# Altium PCB DT2.PcbDoc
Units mil, origin at the board's own origin, x right, y up, seen from the top; angles counter-clockwise.
Board outline 6000 x 4000 mil, 2 copper layers (Top Layer, Bottom Layer); 93 components, 47 nets, 265 pads, 0 vias.
Unrouted connection lines stored in the file: 186.
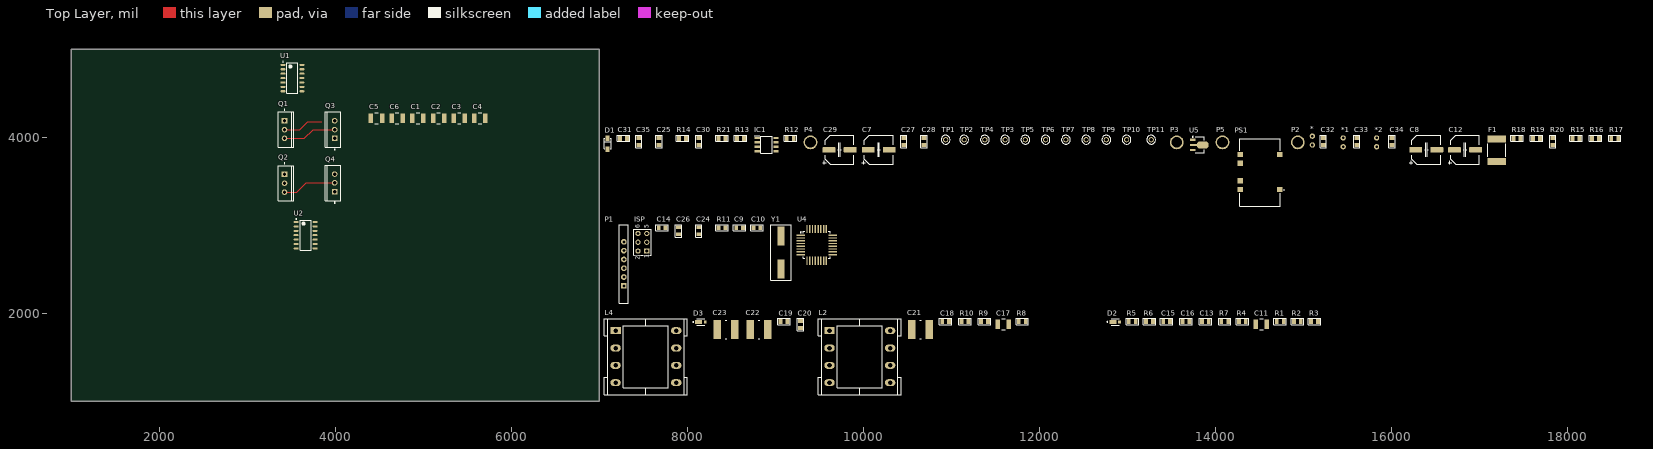
[diagram p0: Top Layer view]
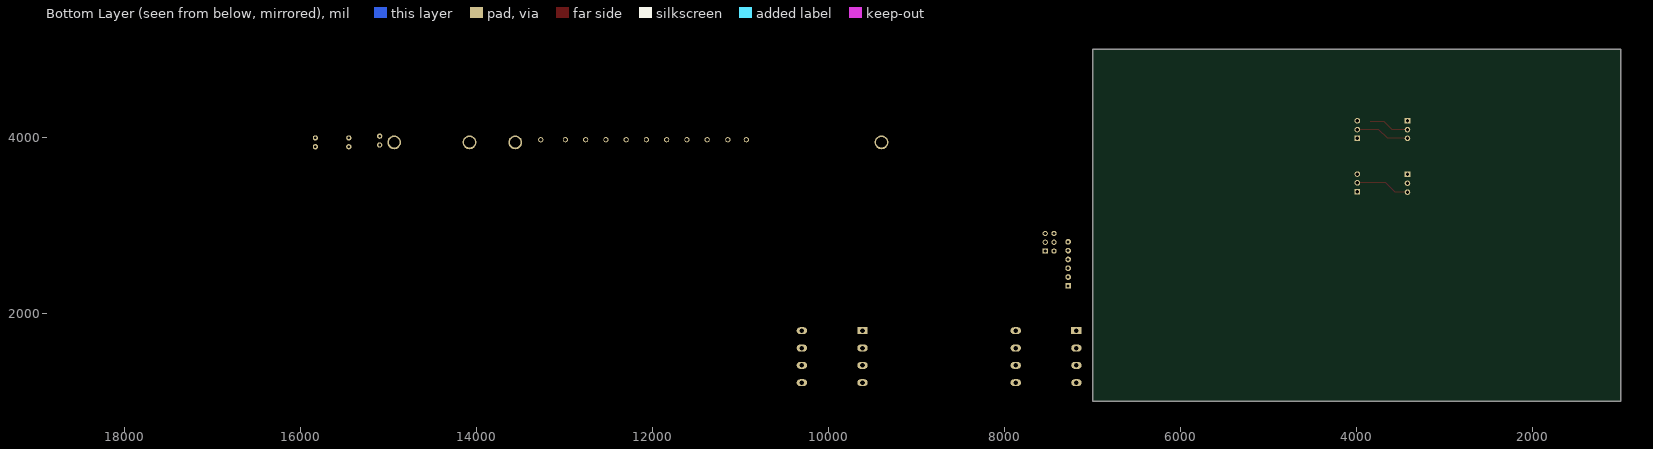
[diagram p1: Bottom Layer view, seen from below]

## Layer stack, top to bottom
Top Solder: solder mask 0.4, Solder Resist, Dk 3.5
Top Layer: signal copper 1.4
Dielectric 1: dielectric 12.6, FR-4, Dk 4.8
Bottom Layer: signal copper 1.4
Bottom Solder: solder mask 0.4, Solder Resist, Dk 3.5

## Board outline
1000,1000 7000,1000 7000,5000 1000,5000

## Design rules (kind name [scope] priority, off if disabled: settings)
Clearance [All] p1: gap=10 ignorepadtopadclearanceinfootprint=FALSE except(0: Arc-Hole Track-Hole SMDPad-Hole THPad-Hole Via-Hole Fill-Hole Poly-Hole Region-Hole Text-Hole)
PolygonConnect [All] p1: connectstyle=Relief reliefconductorwidth=10 reliefentries=4 polygonreliefangle="90 Angle" airgapwidth=10
RoutingVias [All] p1: holewidth=28 width=50 viastyle="Through Hole" minholewidth=28 minwidth=50 maxholewidth=28 maxwidth=50
SolderMaskExpansion [All] p1: expansion=4 istentingtop=FALSE
Width [All] p1: maxlimit=10 minlimit=10 preferedwidth=10
30 further rules are at their usual default settings.

## Classes and differential pairs
component class Misc: * *1 *2 C7 C8 C12 C25 C27 C28 C29 C30 C31 C32 C33 C34 C35 D1 F1 IC1 P2 P3 P4 P5 PS1 R12 R13 R14 R15 R16 R17 R18 R19 R20 R21 TP1 TP2 TP3 TP4 TP5 TP6 TP7 TP8 TP9 TP10 TP11 U5
component class Control: C9 C10 C14 C24 C26 ISP P1 R11 U4 Y1
component class Bridge: C1 C2 C3 C4 C5 C6 C11 C13 C15 C16 C17 C18 C19 C20 C21 C22 C23 D2 D3 L2 L4 Q1 Q2 Q3 Q4 R1 R2 R3 R4 R5 R6 R7 R8 R9 R10 U1 U2

## Components (designator, comment, footprint, x,y, rotation, side; value= is the part's Value field where it differs from the comment)
* "Thermistor" LeadedThermistor 15100,3910 r0 top
*1 "Thermistor" LeadedThermistor 15450,3890 r0 top
*2 "Thermistor" LeadedThermistor 15830,3890 r0 top
C1 "*" C1210 4940,4215 r0 top
C2 "*" C1210 5175,4215 r0 top
C3 "*" C1210 5410,4215 r0 top
C4 "*" C1210 5645,4215 r0 top
C5 "*" C1210 4470,4215 r0 top
C6 "*" C1210 4705,4215 r0 top
C7 "*" "CAP POL 8x5.4mm SMT" 10175,3855 r0 top
C8 "10u" "CAP POL 8x5.4mm SMT" 16395,3855 r0 top
C9 "*" "0805 CAP" 8595,2970 r0 top
C10 "*" "0805 CAP" 8790,2970 r0 top
C11 "10u" C1210 14520,1875 r0 top
C12 "10u" "CAP POL 8x5.4mm SMT" 16835,3855 r0 top
C13 "*" "0805 CAP" 13885,1905 r0 top
C14 "*" "0805 CAP" 7715,2970 r0 top
C15 "*" "0805 CAP" 13445,1905 r0 top
C16 "*" "0805 CAP" 13665,1905 r0 top
C17 "10u" C1210 11590,1875 r0 top
C18 "*" "0805 CAP" 10935,1905 r0 top
C19 "*" "0805 CAP" 9100,1905 r0 top
C20 "*" "0805 CAP" 9285,1870 r90 top
C21 "*" C5750 10650,1815 r0 top
C22 "*" C5750 8815,1815 r0 top
C23 "*" C5750 8440,1815 r0 top
C24 "*" "0805 CAP" 8130,2935 r90 top
C25 "*" "0805 CAP" 7680,3950 r90 top
C26 "*" "0805 CAP" 7900,2935 r90 top
C27 "*" "0805 CAP" 10460,3950 r90 top
C28 "*" "0805 CAP" 10690,3950 r90 top
C29 "*" "CAP POL 8x5.4mm SMT" 9730,3855 r0 top
C30 "*" "0805 CAP" 8130,3950 r90 top
C31 "*" "0805 CAP" 7275,3985 r0 top
C32 "*" "0805 CAP" 15225,3950 r90 top
C33 "*" "0805 CAP" 15605,3950 r90 top
C34 "*" "0805 CAP" 16005,3950 r90 top
C35 "*" "0805 CAP" 7450,3950 r90 top
D1 "BZT52H-B5V1" SOD123 7095,3925 r90 top
D2 "MSS1P6-M3/89A" FP-96591-MFG 12860,1900 r0 top value=40pF
D3 "MSS1P6-M3/89A" FP-96591-MFG 8155,1900 r0 top value=40pF
F1 "2920L150DR" LFUS-2920L150DR_V 17195,3850 r90 top
IC1 "ACS730KLCTR-20AB-T" SOIC127P600X175-8N 8900,3915 r0 top
ISP "P2" HDR2X3 7540,2705 r90 top
L2 "*" EFD20 9960,1505 r0 top
L4 "*" EFD20 7530,1505 r0 top
P1 "BLE Module Header" HM10_HDR1X6 7280,2310 r90 top
P2 "Lug" "M3 Lug" 14935,3940 r0 top
P3 "Lug" "M3 Lug" 13560,3940 r0 top
P4 "Lug" "M3 Lug" 9400,3940 r0 top
P5 "Lug" "M3 Lug" 14080,3940 r0 top
PS1 "STH0548S12" STH0548S12 14505,3595 r90 top
Q1 "IPP80N04S4-04" INF-PG-TO220-3-1 3425,4085 r0 top
Q2 "IPP80N04S4-04" INF-PG-TO220-3-1 3425,3475 r0 top
Q3 "IPP80N04S4-04" INF-PG-TO220-3-1 3995,4085 r180 top
Q4 "IPP80N04S4-04" INF-PG-TO220-3-1 3995,3480 r180 top
R1 "*" "0805 RES" 14735,1905 r0 top
R2 "*" "0805 RES" 14930,1905 r0 top
R3 "*" "0805 RES" 15125,1905 r0 top
R4 "*" "0805 RES" 14305,1905 r0 top
R5 "*" "0805 RES" 13055,1905 r0 top
R6 "*" "0805 RES" 13250,1905 r0 top
R7 "*" "0805 RES" 14105,1905 r0 top
R8 "*" "0805 RES" 11805,1905 r0 top
R9 "*" "0805 RES" 11375,1905 r0 top
R10 "*" "0805 RES" 11155,1905 r0 top
R11 "*" "0805 RES" 8395,2970 r0 top
R12 "*" "0805 RES" 9170,3985 r0 top
R13 "*" "0805 RES" 8605,3985 r0 top
R14 "*" "0805 RES" 7945,3985 r0 top
R15 "*" "0805 RES" 18095,3985 r0 top
R16 "*" "0805 RES" 18315,3985 r0 top
R17 "*" "0805 RES" 18535,3985 r0 top
R18 "*" "0805 RES" 17425,3985 r0 top
R19 "*" "0805 RES" 17645,3985 r0 top
R20 "*" "0805 RES" 17830,3950 r90 top
R21 "*" "0805 RES" 8395,3985 r0 top
TP1 "5003" TP_TH 10935,3970 r0 top
TP2 "5003" TP_TH 11145,3970 r0 top
TP3 "5003" TP_TH 11610,3970 r0 top
TP4 "5003" TP_TH 11380,3970 r0 top
TP5 "5003" TP_TH 11840,3970 r0 top
TP6 "5003" TP_TH 12070,3970 r0 top
TP7 "5003" TP_TH 12300,3970 r0 top
TP8 "5003" TP_TH 12530,3970 r0 top
TP9 "5003" TP_TH 12760,3970 r0 top
TP10 "5003" TP_TH 12990,3970 r90 top
TP11 "5003" TP_TH 13270,3970 r90 top
U1 "IR21834STRPBF" SOIC127P600X175-14N 3515,4670 r0 top
U2 "IR21834STRPBF" SOIC127P600X175-14N 3665,2885 r0 top
U4 "ATmega328PB MCU" "32 - TQFP" 9470,2775 r0 top
U5 "L78L05" SOT-89 13820,3910 r0 top
Y1 "SMT-XTAL 16MHz" HC49-US 9065,2690 r90 top

## Footprints (in the part's own frame and the unit in brackets; to place one, negate y for a bottom-side part, rotate by r counter-clockwise, add the part's x,y. Pads: shape width x height; smd on the part's side, far side on the other; paste and mask are expansions set on the pad)
"32 - TQFP" [mm]
  rect 2.4x0.4 smd: 1(-4.6,2.8) 2(-4.6,2) 3(-4.6,1.2) 4(-4.6,0.4) 5(-4.6,-0.4) 6(-4.6,-1.2) 7(-4.6,-2) 8(-4.6,-2.8) 17(4.6,-2.8) 18(4.6,-2) 19(4.6,-1.2) 20(4.6,-0.4) 21(4.6,0.4) 22(4.6,1.2) 23(4.6,2) 24(4.6,2.8)
  rect 0.4x2.4 smd: 9(-2.8,-4.6) 10(-2,-4.6) 11(-1.2,-4.6) 12(-0.4,-4.6) 13(0.4,-4.6) 14(1.2,-4.6) 15(2,-4.6) 16(2.8,-4.6) 25(2.8,4.6) 26(2,4.6) 27(1.2,4.6) 28(0.4,4.6) 29(-0.4,4.6) 30(-1.2,4.6) 31(-2,4.6) 32(-2.8,4.6)
  silkscreen extent -4.74,-3.9 3.9,3.9, body extent -4.5,-4.5 4.5,4.5, height 1.3
"0805 CAP" [mm] "http://www.digikey.co.nz/Web%20Export/Supplier%20Content/Vishay_8026/PDF/VishayBeyschlag_SolderPad.pdf?redirected=1 with dimension G modified by +0.25mm"
  rect 1.1x1.4 smd: 1(-1,0) 2(1,0)
  silkscreen extent -1.8,-0.9 1.8,0.9, body extent -1.04,-0.66 1.04,0.66, height 0.61
"0805 RES" [mm] "http://www.digikey.co.nz/Web%20Export/Supplier%20Content/Vishay_8026/PDF/VishayBeyschlag_SolderPad.pdf?redirected=1 with dimension G modified by +0.25mm"
  rect 1.1x1.4 smd: 1(-1,0) 2(1,0)
  silkscreen extent -1.8,-0.9 1.8,0.9, body extent -1.04,-0.66 1.04,0.66, height 0.61
C1210 [mm]
  rect 1.3x2.7 smd: 1(-1.6,0) 2(1.6,0)
  silkscreen extent -0.5,-1.6 0.5,1.6, body extent -1.8,-1.4 1.8,1.4, height 1.24
C5750 [mm] "C5750 footprint"
  rect 2.2x5.5 smd: 1(-2.525,0) 2(2.525,0)
  silkscreen extent -0.25,-2.65 0.25,2.65, body extent -3.05,-2.7 3.05,2.7, height 3.2
"CAP POL 8x5.4mm SMT" [mm]
  round 0.508 on Mech15: 0(0,0)
  rrect25% 3.7x1.6 smd: 1(-3.05,0) 2(3.05,0)
  silkscreen extent -4.9,-4.2 4.15,4.15, body extent -4.5,-4.15 4.5,4.15, height 5.4
EFD20 [mm]
  oval 3x2 hole 1.3: 1(-8.75,-7.5) 1(-8.75,-2.5) 1(-8.75,2.5) 2(8.75,-7.5) 2(8.75,-2.5) 2(8.75,2.5) 2(8.75,7.5)
  rect 3x2 hole 1.3: 1(-8.75,7.5)
  silkscreen extent -12,-11 12,11
FP-96591-MFG [mm]
  rect 2x1.1 smd paste+0 mask+0: 1(-0.65,0)
  rect 0.8x0.8 smd paste+0 mask+0: 2(1.25,0)
  silkscreen extent -2.35,-0.92 1.15,0.92, body extent -1.75,-0.8 1.75,0.8, height 0.25
HC49-US [mm] "20Mhz Crystal"
  rect 5.5x2 smd: 1(-4.75,0) 2(4.75,0)
  silkscreen extent -8,-3 8,3, body extent -4.77,-2.4 4.79,2.4, height 3.8
HDR2X3 [mm] "Connector; Header; 3x2 Position"
  rect 1.5x1.5 hole 0.9: 1(0,0)
  round 1.5 hole 0.9: 2(0,2.54) 3(2.54,0) 4(2.54,2.54) 5(5.08,0) 6(5.08,2.54)
  silkscreen extent -1.27,-1.27 6.35,3.81
HM10_HDR1X6 [mil] "Connector; Header; 6 Position"
  rect 65x65 hole 35.43: 1(0,0)
  round 65 hole 35.43: 2(100,0) 3(200,0) 4(300,0) 5(400,0) 6(500,0)
  silkscreen extent -200,-50 695,50, body extent -142,-39 571,228, height 1843
INF-PG-TO220-3-1 [mm] "FM, 3-Leads, Body 10x4.4mm, Pitch 2.54mm"
  rect 1.6x1.6 hole 1: 1(0,2.54)
  round 1.6 hole 1: 2(0,0) 3(0,-2.54)
  silkscreen extent -1.75,-5.1 2.65,5.87, body extent -1.75,-5.1 2.65,5.1, height 20.7
LeadedThermistor [mil]
  round 60 hole 30: 1(0,0) 2(0,100)
LFUS-2920L150DR_V [mm] "SMD, 2-Leads, Body 5.12x7.355mm"
  rect 2x5.3 smd: 1(-3.3,0) 2(3.3,0)
  silkscreen extent -1.9,-2.56 1.9,2.56, body extent -3.68,-2.56 3.68,2.56, height 1.25
"M3 Lug" [mm]
  round 4 hole 3.1: 1(0,0)
SOD123 [mm] "SOD-123; 2 Leads; Body 2.7 x 1.6 mm, (LxW)"
  rect 1.6x1.2 smd: 1(-1.65,0) 2(1.55,0)
  silkscreen extent -1.5,-1 1.5,1, body extent -1.8,-0.86 1.8,0.86, height 1.21
SOIC127P600X175-8N [mm]
  rect 1.525x0.65 smd: 1(-2.712,1.905) 2(-2.712,0.635) 3(-2.712,-0.635) 4(-2.712,-1.905) 5(2.712,-1.905) 6(2.712,-0.635) 7(2.712,0.635) 8(2.712,1.905)
  silkscreen extent -3.47,-2.45 1.6,2.58, body extent -3,-2.45 3,2.45, height 1.75
SOIC127P600X175-14N [mm] "SOIC, 14-Leads, Body 8.65x3.90mm, Pitch 1.27mm, IPC Medium Density"
  oval 1.45x0.6 smd: 1(-2.725,3.81) 2(-2.725,2.54) 3(-2.725,1.27) 4(-2.725,0) 5(-2.725,-1.27) 6(-2.725,-2.54) 7(-2.725,-3.81) 8(2.725,-3.81) 9(2.725,-2.54) 10(2.725,-1.27) 11(2.725,0) 12(2.725,1.27) 13(2.725,2.54) 14(2.725,3.81)
  silkscreen extent -2.85,-4.35 1.6,4.78, body extent -2,-4.35 2,4.35, height 1.75
SOT-89 [mm] "SOT89, 3-Leads, Body 4.5x2.4 mm, Pitch 1.5mm, Lead Span 4.1mm, IPC Low Density"
  rect 1.6x0.6 smd: 1(-2,1.5) 3(-2,-1.5)
  rect 2x0.7 smd: 2(-1.8,0)
  oct 3.4x2 smd: 2(0.9,0)
  silkscreen extent -2.07,-2.3 1.3,2.47, body extent -2.25,-2.29 2,2.29, height 1.6
STH0548S12 [mm]
  rect 1.5x1.61 smd: 1(-4.88,-5.655) 5(5.28,-5.655) 6(5.28,5.655) 7(2.74,5.655) 9(-2.34,5.655) 10(-4.88,5.655)
  silkscreen extent -9.75,-7 9.75,5.9, body extent -9.75,-6.31 9.75,6.31, height 5.6
TP_TH [mm] "Test Point, Through Hole, Dia 2.54mm"
  round 1.5 hole 1: 1(0,0)
  silkscreen extent -1.27,-1.27 1.27,1.27, body extent -1.27,-1.27 1.27,1.27, height 4.57

## Part data
C1 C2 C3 C4 C5 C6 C9 C10 C11 C13 C14 C15 C16 C17 C18 C19 C20 C21 C22 C23 C24 C25 C26 C27 C28 C30 C31 C32 C33 C34 C35: library part CerCap_SMT, "SMT ceramic capacitor selectable size"
C7 C8 C12 C29: library part ElecCap_SMT_8D0, "CAP ALUM 22UF 20% 50V SMD (Model: UWX1H220MCL1GB)", Capacitance 1="22 µF", ESR (Equivalent Series Resistance)=-, Lifetime @ Temp.="2000 Hrs @ 85°C", Manufacturer=Nichicon, Manufacturer Part Number=UWX1V220MCL1GB, Operating Temperature="-40°C ~ 85°C", Package / Case="Radial, Can - SMD", Supplier Part Number 1=493-2136-1-ND, Tolerance=±20%, Applications="General Purpose", Category=Capacitors, ComponentLink1Description=http://nichicon-us.com/english/products/pdfs/e-uwx.pdf, ComponentLink1URL=http://nichicon-us.com/english/products/pdfs/e-uwx.pdf, Height - Seated (Max)="0.213\" (5.40mm)", Lead Spacing=-, Mounting Type="Surface Mount", Packaging="Cut Tape (CT)", Part Status=Active, Polarization=Polar, Pricing 1="1=0.59, 10=0.406, 100=0.2304, 500=0.16268 (NZD)", Ratings=-, Revision="July-2002: Re-released for DXP Platform.", RoHS="RoHS Compliant", Size / Dimension="0.248\" Dia (6.30mm)", Stock 1=680, Supplier 1=Digi-Key, Surface Mount Land Size="0.260\" L x 0.260\" W (6.60mm x 6.60mm)"
D1: library part Zener_SMT_SOD123, "SMT zener diode with SOD123 package", Manufacturer="Nexperia USA Inc.", Manufacturer Part Number=BZT52H-B5V1,115, Operating Temperature="-65°C ~ 150°C (TA)", Package / Case=SOD-123F, Tolerance=±2%, Category="Discrete Semiconductor Products", ComponentLink1Description=https://assets.nexperia.com/documents/data-sheet/BZT52H_SER.pdf, ComponentLink1URL=https://assets.nexperia.com/documents/data-sheet/BZT52H_SER.pdf, Mounting Type="Surface Mount", Packaging="Cut Tape (CT)", Part Status=Active, Pricing 1="1=0.51, 10=0.408, 100=0.2164, 500=0.14232, 1000=0.09678 (NZD)", RoHS="RoHS Compliant", Stock 1=0, Supplier 1=Digi-Key, Supplier Device Package=SOD-123F
D2 D3: "DIODE SCHOTTKY 60V 1A MICROSMP", Capacitance=40pF, Forward Current=1A, Manufacturer=Vishay, Max Junction Temp=+150°C, Max Repetitive Reverse Voltage=60V, Max Surge Forward Current=25A, Package=96591, Peak Reverse Current=20uA, Temperature="-55°C to +150°C", Temperature Range Low=-55°C, Automotive=No, Category=Diode, ComponentLink2Description=Datasheet, ComponentLink2URL=http://www.vishay.com/docs/89018/mss1p6.pdf, Device Class L1="Discrete Semiconductors", Device Class L2=Diodes, Device Class L3="Schottky Diodes", Digikey Description="DIODE SCHOTTKY 60V 1A MICROSMP", Footprint Url=http://www.vishay.com/docs/96591/microsmp_do-219ad_fredpt.pdf, Height=0.73mm, Lead Free=Yes, Manufacturer Part Number=MSS1P6-M3/89A, Mouser Description="Schottky Diodes & Rectifiers 1.0 Amp 60 Volt", Octopart=https://octopart.com/mss1p6-m3%2F89a-vishay-42763284, RoHS=TRUE, Temperature Range High=+150°C
F1: "PTC Resettable Fuse 1.5A(hold) 3A(trip) 33VDC 40A 1.5W 2s 0.08Ohm SMD Solder Pad 2920 T/R", Case Code (Imperial)=2920, Case Code (Metric)=7351, Current Rating=40A, Hold Current=1.5A, Manufacturer=Littelfuse, Max Operating Temperature=85°C, Min Operating Temperature=-40°C, Operating Supply Voltage=33V, Package Quantity=1500, Power Dissipation=1.5W, Resistance=230mR, Trip Current=3A, Approvals=cULus,TUV, Case/Package=2920, Category="PTC Resettable Fuses", ComponentLink1Description=https://datasheet.ciiva.com/30470/0900766b8128f916-30470046.pdf?src-supplier=RSComponents, ComponentLink1URL=https://datasheet.ciiva.com/30470/0900766b8128f916-30470046.pdf?src-supplier=RSComponents, ComponentLink2Description=https://datasheet.ciiva.com/14119/2920l-eng-datasheet-14119786.pdf?src-supplier=Distrelec, ComponentLink2URL=https://datasheet.ciiva.com/14119/2920l-eng-datasheet-14119786.pdf?src-supplier=Distrelec, ComponentLink3Description=https://datasheet.ciiva.com/325/littelfuse-ptc-2920l-325940.pdf?src-supplier=Digi-Key, ComponentLink3URL=https://datasheet.ciiva.com/325/littelfuse-ptc-2920l-325940.pdf?src-supplier=Digi-Key, ComponentLink4Description=https://datasheet.ciiva.com/325/littelfuse-ptc-2920l-325941.pdf?src-supplier=Digi-Key, ComponentLink4URL=https://datasheet.ciiva.com/325/littelfuse-ptc-2920l-325941.pdf?src-supplier=Digi-Key, ComponentLink5Description=https://datasheet.ciiva.com/325/littelfuse-ptc-2920l-325942.pdf?src-supplier=Digi-Key, ComponentLink5URL=https://datasheet.ciiva.com/325/littelfuse-ptc-2920l-325942.pdf?src-supplier=Digi-Key, ComponentLink6Description=https://datasheet.ciiva.com/1273/578244-1273819.pdf?src-supplier=Element14, ComponentLink6URL=https://datasheet.ciiva.com/1273/578244-1273819.pdf?src-supplier=Element14, ComponentLink7Description=https://datasheet.ciiva.com/16305/littelfuse-ptc-2920l-16305114.pdf?src-supplier=Future+Electronics, ComponentLink7URL=https://datasheet.ciiva.com/16305/littelfuse-ptc-2920l-16305114.pdf?src-supplier=Future+Electronics, ComponentLink8Description=https://datasheet.ciiva.com/15226/getdatasheetpartid-158319-15226903.pdf?src-supplier=Verical, ComponentLink8URL=https://datasheet.ciiva.com/15226/getdatasheetpartid-158319-15226903.pdf?src-supplier=Verical, ComponentLink9Description=https://datasheet.ciiva.com/28410/699682-28410950.pdf?src-supplier=Element14, ComponentLink9URL=https://datasheet.ciiva.com/28410/699682-28410950.pdf?src-supplier=Element14, Height=1.25mm, Lead Free="Lead Free", Length=7.98mm, Manufacturer Part Number=2920L150DR, Max Current Rating=40A, Packaging="Tape and Reel", Pricing 1="1=0.66000, 5=0.64400, 10=0.62400, 50=0.52520, 100=0.43600, 250=0.39640, 500=0.33694 (USD)", REACH SVHC="No SVHC", RoHS=Yes, RoHS Compliant=Yes, Series=2920L, Stock 1=8939, Supplier 1=Digi-Key, Terminal Material=Copper, Termination=SMD/SMT, Time to Trip=2s, Voltage Rating=33V, Voltage Rating (DC)=33V, Width=5.44mm, Working Voltage=33V
IC1: "Integrated Circuit", Manufacturer_Name="Allegro Microsystems", Arrow Part Number=ACS730KLCTR-20AB-T, Arrow Price/Stock=https://www.arrow.com/en/products/acs730klctr-20ab-t/allegro-microsystems?region=nac, Datasheet Link=https://www.allegromicro.com/-/media/files/datasheets/acs730-datasheet.ashx, Height=1.75mm, Manufacturer_Part_Number=ACS730KLCTR-20AB-T
ISP: library part "Header 3X2", "Header, 3-Pin, Dual row", LatestRevisionDate=17-Jul-2002, LatestRevisionNote="Re-released for DXP Platform.", Publisher="Altium Limited"
L2 L4: library part L
P1: library part BLEModule_TH, "2.54mm pitch 6-pin header for BLE module", LatestRevisionDate=17-Jul-2002, LatestRevisionNote="Re-released for DXP Platform.", Publisher="Altium Limited"
PS1: "Power Supply", Manufacturer_Name="XP POWER", Manufacturer_Part_Number=STH0548S15, Datasheet Link=https://4donline.ihs.com/images/VipMasterIC/IC/XPPO/XPPO-S-A0009456324/XPPO-S-A0009456324-1.pdf?hkey=EF798316E3902B6ED9A73243A3159BB0, Height=5.5mm
Q1 Q2 Q3 Q4: "OptiMOS-T2 Power-Transistor, 40 V VDS, 80 A ID, PG-TO220-3-1, Tube, Green", Manufacturer=Infineon, ComponentLink1Description="Manufacturer URL", ComponentLink1URL=http://www.infineon.com/, ComponentLink2Description=Datasheet, ComponentLink2URL=http://www.infineon.com/dgdl/IPP_B_I80N04S4-04_DS_1_0.pdf?folderId=db3a304412b407950112b42b75b74520&fileId=db3a304328c6bd5c01291c71d4085dfa&location=en.Products.Automotive_ICs.Automotive_MOSFETs.Single__N-Channel_40V_MOSFETs.DATASHEET.IPP_B_I80N04S4-04_DS_, ComponentLink3Description="Package Specification", ComponentLink3URL=http://www.infineon.com/dgdl/BTS117_DS_14.pdf?folderId=db3a30431400ef68011421b54e2e0564&fileId=db3a30433a747525013abff8302d549c&location=en.Products.Automotive_ICs.Smart_High-_and_Low-Side_Switches.HITFET___TEMPFET__-_Smart_Low-Side_Switches.DATASHEET.BTS1, DatasheetVersion="Rev. 1.0", Green=TRUE, Halogen-free=TRUE, ID (max)="80 A", IDpuls (max)="320 A", Mounting Technology="Through Hole", PackageDescription="3-Pin Plastic (Green) Transistor Single Outline Package, 10 x 9.25 mm Body, 2.54 mm Pitch", PackageReference=PG-TO220-3-1, PackageVersion=Jul-12, Packing=Tube, PartNumber=IPP80N04S4-04, Ptot (max)="71 W", QG="33 nC", RDS (on) (max) (@10V)="4.6 mOhm", RthJC (max)="2.1 K/W", Technology=OptiMOS-T2, VDS (max)="40 V", VGS(th) (max)="4 V", VGS(th) (min)="2 V"
R1 R2 R3 R4 R5 R6 R7 R8 R9 R10 R11 R12 R13 R14 R15 R16 R17 R18 R19 R20 R21: library part Res_SMT_0805, "0805 resistor", ComponentLink1Description=https://nz.mouser.com/datasheet/2/315/AOA0000C304-1149620.pdf, LatestRevisionDate=17-Jul-2002, LatestRevisionNote="Re-released for DXP Platform.", PackageReference=AXIAL-0.4, Published=8-Jun-2000, Publisher="Altium Limited"
TP1 TP2 TP3 TP4 TP5 TP6 TP7 TP8 TP9 TP10 TP11: library part TestPoint, "Test Point, Orange, 1-Pin THD, RoHS", Forward Current="3 A", Forward Voltage="1.08 V", Max Operating Temperature="150 degC", Max Surge Current="80 A", Min Operating Temperature="-65 degC", Package Quantity=500, Peak Reverse Current="600 uA", ComponentLink1Description="Manufacturer URL", ComponentLink1URL=http://www.keyelco.com/, ComponentLink2Description=Datasheet, ComponentLink2URL=http://keyelco.com/userAssets/file/M65p56.pdf, DatasheetVersion=Jun-15, Diameter="5.3 mm", Height="0.25 inch", Length="9.5 mm", Mount="Through Hole", PackageDescription="1-Pin Through Hole Device, Dia 2.54 mm", PackageReference=5003, Packaging=Bulk, Pins=2, Radiation Hardening=No, REACH SVHC="No SVHC", RoHSCompliant=true, Weight="0.01 lb", Width="0.25 inch"
U1 U2: "600 V half-bridge gate driver IC with programmable deadtime, SOIC 14N, RoHS", Case/Package=SOIC, Manufacturer="International Rectifier", Max Operating Temperature=125°C, Max Output Current=2.3A, Max Power Dissipation=1W, Max Supply Current=1.6mA, Max Supply Voltage=20V, Min Operating Temperature=-40°C, Min Supply Voltage=10V, Nominal Supply Current=1mA, Output Current=1.9A, Package Quantity=1, Category="Gate Drivers", ComponentLink1Description=https://datasheet.ciiva.com/26878/ir21834strpbf-26878870.pdf?src-supplier=IIIC, ComponentLink1URL=https://datasheet.ciiva.com/26878/ir21834strpbf-26878870.pdf?src-supplier=IIIC, ComponentLink2Description=https://datasheet.ciiva.com/8068/ir2183-8068250.pdf?src-supplier=Element14, ComponentLink2URL=https://datasheet.ciiva.com/8068/ir2183-8068250.pdf?src-supplier=Element14, ComponentLink3Description=https://datasheet.ciiva.com/1950/ir2183-1950222.pdf?src-supplier=Digi-Key, ComponentLink3URL=https://datasheet.ciiva.com/1950/ir2183-1950222.pdf?src-supplier=Digi-Key, ComponentLink4Description=https://datasheet.ciiva.com/1950/ir2183-1950223.pdf?src-supplier=Digi-Key, ComponentLink4URL=https://datasheet.ciiva.com/1950/ir2183-1950223.pdf?src-supplier=Digi-Key, ComponentLink5Description=https://datasheet.ciiva.com/1950/ir2183-1950221.pdf?src-supplier=Digi-Key, ComponentLink5URL=https://datasheet.ciiva.com/1950/ir2183-1950221.pdf?src-supplier=Digi-Key, ComponentLink6Description=https://datasheet.ciiva.com/16287/ir2183-16287545.pdf?src-supplier=Future+Electronics, ComponentLink6URL=https://datasheet.ciiva.com/16287/ir2183-16287545.pdf?src-supplier=Future+Electronics, Fall Time=35ns, Height=1.5mm, Length=8.74mm, Manufacturer Part Number=IR21834STRPBF, Mount="Surface Mount", Number of Drivers=2, Number of Outputs=2, Number of Pins=14, Output Voltage=20V, Packaging="Tape and Reel", Power Dissipation=1W, Propagation Delay=330ns, REACH SVHC="No SVHC", Rise Time=60ns, RoHS=Yes, RoHS Compliant=Yes, Series=-, Supplier 1=Newark, Turn-Off Delay Time=35ns, Turn-On Delay Time=35ns, Width=3.99mm
U4: library part ATmega328PB_SMT_TQFP32, "IC MCU 8BIT 32KB FLASH 32TQFP", Manufacturer=Atmel, Manufacturer Part Number=ATMEGA328PB-AN, Operating Temperature="-40°C ~ 105°C (TA)", Package / Case=32-TQFP, Supplier Device Package="32-TQFP (7x7)", Voltage - Supply (Vcc/Vdd)="1.8 V ~ 5.5 V", Category="Integrated Circuits (ICs)", ComponentLink1Description=http://www.atmel.com/images/atmel-42397-8-bit-avr-microcontroller-atmega328pb_datasheet.pdf, ComponentLink1URL=http://www.atmel.com/images/atmel-42397-8-bit-avr-microcontroller-atmega328pb_datasheet.pdf, Connectivity="I²C, SPI, UART/USART", Core Processor=AVR, Core Size=8-Bit, Data Converters="A/D 8x10b", EEPROM Size="1K x 8", Number of I/O=27, Oscillator Type=Internal, Packaging=Tray, Part Status=Active, Peripherals="Brown-out Detect/Reset, POR, PWM, WDT", Pricing 1="1=2.74, 10=2.448, 25=2.2032, 100=2.0074, 250=1.81152, 500=1.62548, 1000=1.37088 (USD)", Program Memory Size="32KB (16K x 16)", Program Memory Type=FLASH, RAM Size="2K x 8", RoHS="RoHS Compliant", Speed=20MHz, Stock 1=366, Supplier 1=Digi-Key
U5: library part L78L05_SMT_SOT89, "LDO Voltage Regulator 5V", Supplier Part Number 1=497-1181-1-ND, ComponentLink1Description=http://www.st.com/content/ccc/resource/technical/document/datasheet/99/3b/7d/91/91/51/4b/be/CD00000544.pdf/files/CD00000544.pdf/jcr:content/translations/en.CD00000544.pdf, ComponentLink1URL=http://www.st.com/content/ccc/resource/technical/document/datasheet/99/3b/7d/91/91/51/4b/be/CD00000544.pdf/files/CD00000544.pdf/jcr:content/translations/en.CD00000544.pdf, Supplier 1=Digi-Key
Y1: library part TXC9C-16_XTAL_SMT, "9C-16.000MAAJ-T crystal 16.0000MHZ 18PF SMD", Frequency Stability=±30ppm, Load Capacitance=18pF, Manufacturer="TXC CORPORATION", Manufacturer Part Number=9C-16.000MAAJ-T, Operating Mode=Fundamental, Operating Temperature="-20°C ~ 70°C", Package / Case=HC-49/US, Ratings=-, Supplier Part Number 1=887-1059-1-ND, Category="Crystals, Oscillators, Resonators", ComponentLink1Description=http://www.txccorp.com/download/products/quartz_crystals/2015TXC_9C_32.pdf, ComponentLink1URL=http://www.txccorp.com/download/products/quartz_crystals/2015TXC_9C_32.pdf, Frequency Tolerance=±30ppm, Height - Seated (Max)="0.161\" (4.10mm)", Mounting Type="Surface Mount", Packaging="Cut Tape (CT)", Part Status=Active, Pricing 1="1=0.75, 10=0.628, 50=0.5656, 100=0.5026, 500=0.47744 (NZD)", RoHS="RoHS Compliant", Size / Dimension="0.449\" L x 0.189\" W (11.40mm x 4.80mm)", Stock 1=11514, Supplier 1=Digi-Key, Type="MHz Crystal"

## Nets (pads, with @x,y where several pads share a name; then routed paths per layer and width w, separated by ;. In a path a pad name is that pad's centre, name@x,y a point inside that pad or via, vN(x,y) a via of type N, cw(c..) or ccw(c..) an arc to the next point about the centre after c; other vN are vias at no path point)
5V: C14.1 C26.1 C28.2 C29.1 C30.1 IC1.8 ISP.2 P1.1 R11.2 R15.2 R16.2 R17.2 TP5.1 U4.4 U4.18 U5.1
12V: C7.1 C12.1 C15.1 C16.1 C19.1 C20.1 C27.2 D2.2 D3.2 PS1.5 TP3.1 U1.7 U2.7 U5.3
30V: C1.1 C2.1 C3.1 C4.2 C5.1 C6.1 C8.1 IC1.3 IC1.4 PS1.1 Q1.2 Q2.2 R12.2 | length 462.3
  Top Layer w10: Q1.2 3599.67,4085 3689.67,4175 3850,4175
A: C11.1 D2.1 L2.1 Q1.3 Q3.2 TP10.1 U1.13 | length 611.4
  Top Layer w10: Q1.3 3650,3985 3750,4085 Q3.2
B: C17.1 D3.1 L4.1 Q2.3 Q4.2 TP11.1 U2.13 | length 613.5
  Top Layer w10: Q2.3 3565,3375 3670,3480 Q4.2
GND: *1.1 *2.1 *.1 C1.2 C2.2 C3.2 C4.1 C5.2 C6.2 C7.2 C8.2 C9.1 C10.1 C12.2 C13.1 C14.2 C15.2 C16.2 C18.1 C19.2 C20.2 C24.1 C25.1 C26.2 C27.1 C28.1 C29.2 C30.2 C31.2 C32.2 C33.2 C34.2 C35.1 D1.1 IC1.5 ISP.6 P1.2 P5.1 PS1.7 PS1.9 Q3.3 Q4.3 R4.2 R7.1 R9.1 R10.1 R14.1 TP1.1 TP2.1 U1.3 U1.5 U2.3 U2.5 U4.5 U4.21 U5.2
IP+: F1.2 IC1.1 IC1.2
Isens: C35.2 R21.1 U4.23
Lpt_A: C21.2 P3.1
Lpt_B: C23.2 P4.1
MISO: ISP.4 U4.16
MOSI: ISP.1 U4.15
Net*1_2: *1.2 R16.1 R19.2
Net*2_2: *2.2 R17.1 R20.2
Net*_2: *.2 R15.1 R18.2
NetC11_2: C11.2 U1.11
NetC13_2: C13.2 R3.2 R7.2 U1.1 U1.2
NetC17_2: C17.2 U2.11
NetC18_2: C18.2 R8.2 R10.2 U2.1 U2.2
NetC21_1: C21.1 C22.2 L2.2
NetC22_1: C22.1 C23.1 L4.2
NetC31_1: C31.1 IC1.6
NetD1_2: D1.2 R12.1 R13.2 R14.2
NetIC1_7: IC1.7 R21.2
NetQ1_1: Q1.1 R1.2
NetQ2_1: Q2.1 R2.2
NetQ3_1: Q3.1 R5.1
NetQ4_1: Q4.1 R6.1
NetR4_1: R4.1 U1.4
NetR9_2: R9.2 U2.4
PWM_A: R3.1 U4.13
PWM_B: R8.1 U4.14
RST: C24.2 ISP.5 R11.1 U4.29
Rx: P1.3 U4.30
SCK: ISP.3 U4.17
sw1: R1.1 TP6.1 U1.12
sw2: R5.2 TP7.1 U1.6
sw3: R2.1 TP8.1 U2.12
sw4: R6.2 TP9.1 U2.6
TSens1: C32.1 R18.1 U4.25
TSens2: C33.1 R19.1 U4.26
TSens3: C34.1 R20.1 U4.27
Tx: P1.4 U4.31
Vin: F1.1 P2.1 TP4.1
Vsens: C25.2 R13.1 U4.24
X1: C9.2 U4.7 Y1.1
X2: C10.2 U4.8 Y1.2
pads on no net: C7.0 C8.0 C12.0 C29.0 P1.5 P1.6 PS1.6 PS1.10 U1.8 U1.9 U1.10 U1.14 U2.8 U2.9 U2.10 U2.14 U4.1 U4.2 U4.3 U4.6 U4.9 U4.10 U4.11 U4.12 U4.19 U4.20 U4.22 U4.28 U4.32

## Text inside footprints (layer, text, board x,y; h text height)
ISP: Top Overlay "6" at 7460,2965 h50 r90; Top Overlay "5" at 7560,2965 h50 r90; Top Overlay "2" at 7460,2605 h50 r90; Top Overlay "1" at 7560,2625 h50 r90